# Altium PCB mini_backplane.PcbDoc (part 2 of 3)
Units mil, origin at the board's own origin, x right, y up, seen from the top; angles counter-clockwise.
Board outline 11387.22 x 6068.2 mil, 4 copper layers (Top Layer, POWER, GND, Bottom Layer); 147 components, 166 nets, 1018 pads, 501 vias.
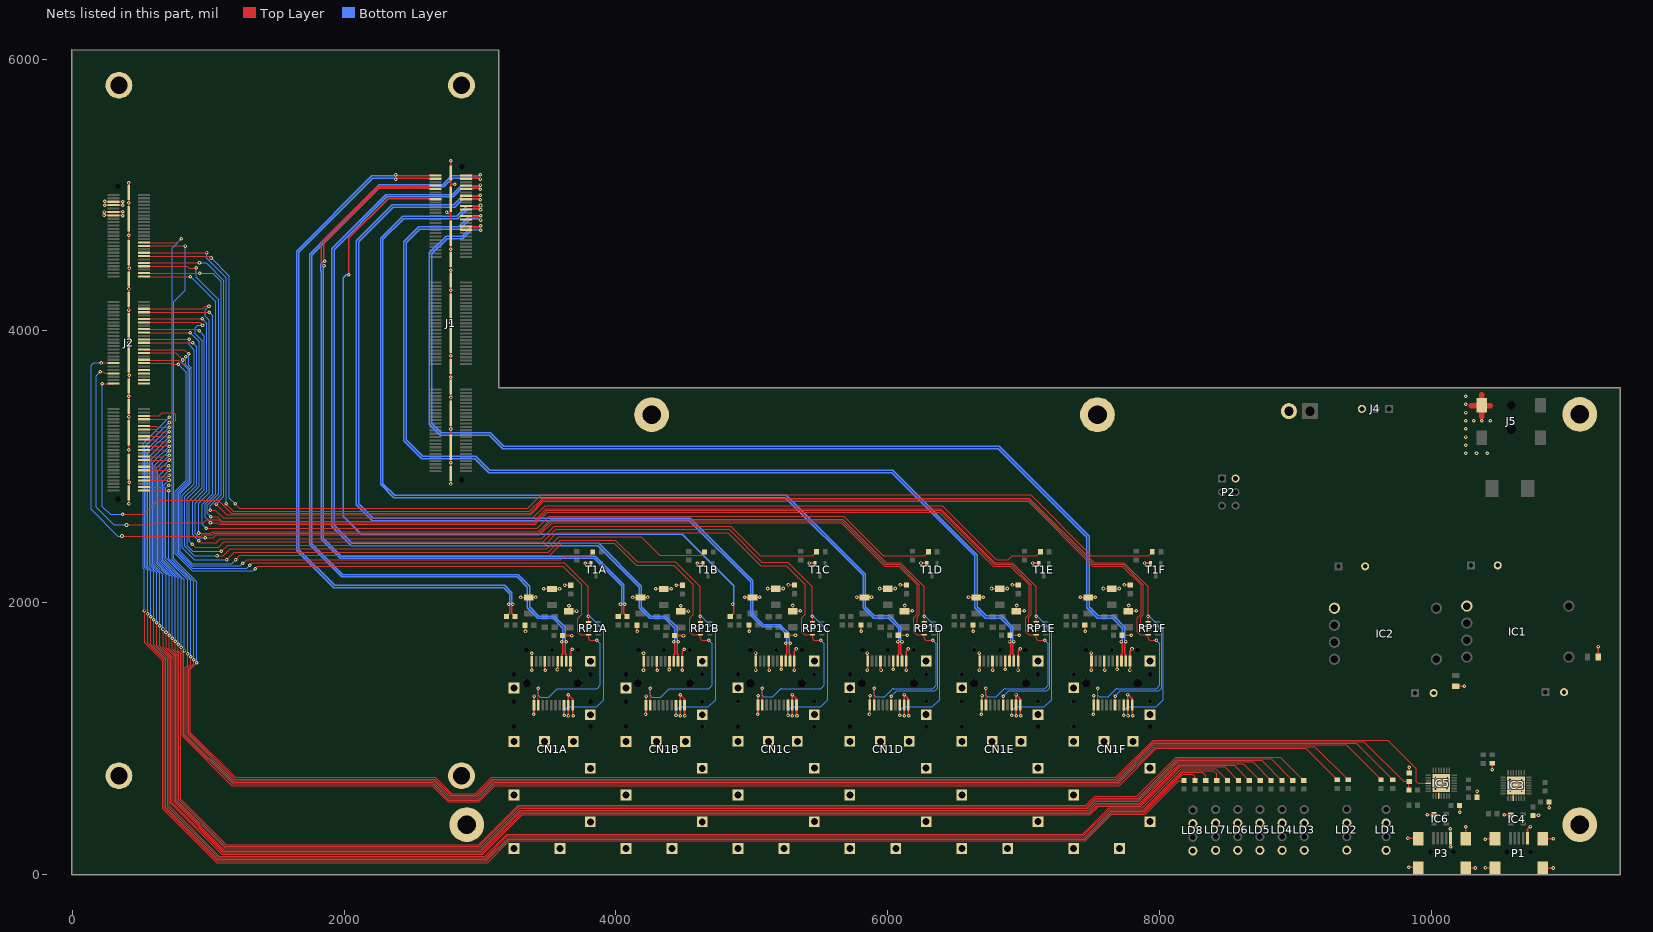
[diagram p4: the nets of this part, all layers, seen from the top]

## Via types
v1: diameter 26, hole 12, Top Layer to Bottom Layer, tented both sides, 501 vias

## Nets (pads, with @x,y where several pads share a name; then routed paths per layer and width w, separated by ;. In a path a pad name is that pad's centre, name@x,y a point inside that pad or via, vN(x,y) a via of type N, cw(c..) or ccw(c..) an arc to the next point about the centre after c; other vN are vias at no path point) (continued)
DETECTD: CN1D.6 J2.41 RP1D.6 | length 9036.5
  Top Layer w6: v1(214,3765) 302.83,3765 J2.41@304.53,3763.31 ; v1(367,2492) 949,2492 957,2500 1034,2500 1047,2513 1231,2513 ; 1225,2513 1231,2513 ; CN1D.6@6025.33,1249.02 6025.33,1312.33 v1(6026,1313) ; RP1D.6@6269,1828.99 6266.99,1831 v1(6215,1831) 6215,1893 6233,1911 6233,2133.94 6083.94,2283 5981.94,2283 5661.94,2603 3525.06,2603 3435.06,2513 1231,2513
  Bottom Layer w6: v1(214,3765) 159,3765 141,3747 141,3683 141,2688.18 337.18,2492 v1(367,2492) ; v1(6026,1313) 6065,1352 6347,1352 6369,1374 6369,1793 6331,1831 v1(6215,1831)
DETECTE: CN1E.6 J2.37 RP1E.6 | length 9719.1
  Top Layer w6: v1(208,3700) 228.35,3700 240,3688.35 J2.37@304.53,3688.35 ; v1(400,2573) 592,2573 608,2589 968,2589 991,2612 1073.12,2612 1096.12,2589 3403.06,2589 3494.06,2680 6384.09,2680 6781.09,2283 6906.94,2283 7056,2133.94 7056,1911 7038,1893 v1(7038,1831) 7089.99,1831 RP1E.6@7092,1828.99 ; CN1E.6@6848.33,1249.02 v1@6848.33,1312.33
  Bottom Layer w6: v1(208,3700) 177,3669 177,2703.09 187,2693.09 307.09,2573 v1(400,2573) ; v1(6849,1313) 6888,1352 7170,1352 7192,1374 7192,1793 7154,1831 v1(7038,1831)
DETECTF: CN1F.6 J2.33 RP1F.6 | length 10432.8
  Top Layer w6: v1(223,3612) 224.39,3613.39 J2.33@304.53,3613.39 ; v1(373,2651) 526,2651 631,2756 1075.89,2756 1170.89,2661 3368.06,2661 3465.06,2758 7036.94,2758 7511.94,2283 7729.94,2283 7879,2133.94 7879,1911 7861,1893 v1(7861,1831) 7912.99,1831 RP1F.6@7915,1828.99 ; CN1F.6@7671.33,1249.02 v1@7671.33,1312.33
  Bottom Layer w6: v1(223,3612) 223,2708 280,2651 v1(373,2651) ; v1(7672,1313) 7711,1352 7993,1352 8015,1374 8015,1793 7977,1831 v1(7861,1831)
FPGA_GPIO0: J2.2 R1.1 | length 11382.9
  Top Layer w6: J2.2@530.12,2825.98 v1(712,2826) ; v1(871.75,1604.25) 871.75,1547.69 846,1521.94 846,1036 1190,692 2663,692 2782,573 2976,573 3095,692 7686,692 7961,967 9445.5,967 R1.1@9714,698.5
  Bottom Layer w6: v1(712,2826) 712,2326.06 871.75,2166.31 v1(871.75,1604.25)
FPGA_GPIO1: J2.4 R2.1 | length 11358.2
  Top Layer w6: J2.4@530.12,2851.18 696.18,2851.18 v1(710,2865) ; v1(849.12,1626.88) 849.12,1542.03 834,1526.91 834,1031.03 1185.03,680 2658.03,680 2777.03,561 2980.97,561 3099.97,680 7690.97,680 7965.97,955 9371.5,955 R2.1@9628,698.5
  Bottom Layer w6: v1(710,2865) 690,2845 690,2331 849.12,2171.88 v1(849.12,1626.88)
FPGA_GPIO2: J2.6 R3.1 | length 11166
  Top Layer w6: J2.6@530.12,2900.94 709.94,2900.94 v1(713,2904) ; v1(826.49,1649.51) 822,1645.02 822,1026.06 1180.06,668 2653.06,668 2772.06,549 2985.94,549 3104.94,668 7695.94,668 7970.94,943 9141.5,943 R3.1@9386,698.5
  Bottom Layer w6: v1(713,2904) 678,2869 678,2320 826.49,2171.51 v1(826.49,1649.51)
FPGA_GPIO3: J2.8 R4.1 | length 11143.7
  Top Layer w6: J2.8@530.12,2926.14 699.14,2926.14 v1(713,2940) ; v1(803.86,1672.14) 804.49,1671.51 804.49,1640.4 810,1634.89 810,1021.09 1175.09,656 2648.09,656 2767.09,537 2990.91,537 3109.91,656 7700.91,656 7975.91,931 9074.5,931 R4.1@9307,698.5
  Bottom Layer w6: v1(713,2940) 666,2893 666,2315.03 803.86,2177.17 v1(803.86,1672.14)
FPGA_GPIO4: J2.10 R5.1 | length 11424.6
  Top Layer w6: J2.10@530.12,2975.91 712.91,2975.91 v1(713,2976) ; v1(781.24,1694.76) 781.86,1694.14 781.86,1646.05 798,1629.92 798,556 1132,222 2991,222 3280.91,511.91 7457.09,511.91 7521.18,576 7832.18,576 8122.18,866 8886.5,866 R5.1@9059,693.5
  Bottom Layer w6: v1(713,2976) 654,2917 654,2310.06 781.24,2182.82 v1(781.24,1694.76)
FPGA_GPIO5: J2.12 R6.1 | length 11397
  Top Layer w6: J2.12@530.12,3001.1 651.1,3001.1 657.1,3001.1 664,3008 v1(712,3008) ; v1@759.24,1716.76 759.24,1651.71 786,1624.95 786,551.03 1127.03,210 2995.97,210 3285.88,499.91 7462.06,499.91 7526.15,564 7837.15,564 8127.15,854 8818.5,854 R6.1@8979,693.5
  Bottom Layer w6: v1(712,3008) 642,2938 642,2305.09 758.61,2188.48 v1(758.61,1717.39)
FPGA_GPIO6: J2.14 R7.1 | length 11380.8
  Top Layer w6: J2.14@530.12,3050.87 713.87,3050.87 v1(714,3051) ; v1(735.98,1740.02) 736.61,1739.39 736.61,1657.37 774,1619.98 774,546.06 1122.06,198 3000.94,198 3290.85,487.91 7467.03,487.91 7531.12,552 7842.12,552 8132.12,842 8750.5,842 R7.1@8899,693.5
  Bottom Layer w6: v1(714,3051) 630,2967 630,2300.12 735.98,2194.14 v1(735.98,1740.02)
FPGA_GPIO7: J2.16 R8.1 | length 11359.6
  Top Layer w6: J2.16@530.12,3076.06 671.06,3076.06 682,3087 713,3087 v1(714,3086) ; v1@713.98,1762.02 713.98,1663.02 762,1615.01 762,541.09 1117.09,186 3005.91,186 3295.82,475.91 7472,475.91 7536.09,540 7847.09,540 8040.54,733.46 8137.09,830 8682.5,830 R8.1@8819,693.5
  Bottom Layer w6: v1(713.35,1762.65) 713.35,2199.79 618,2295.15 618,2990 v1(714,3086)
FPGA_GPIO8: J2.18 R9.1 | length 11330.6
  Top Layer w6: J2.18@530.12,3125.83 664.17,3125.83 673,3117 713,3117 v1(714,3118) ; v1@691.35,1784.65 691.35,1668.68 750,1610.03 750,536.12 1112.12,174 3010.88,174 3300.79,463.91 7476.97,463.91 7541.06,528 7852.06,528 8049.03,724.97 8142.06,818 8614.5,818 R9.1@8739,693.5
  Bottom Layer w6: v1(690.73,1785.27) 690.73,2205.45 606,2290.18 606,3010 v1(714,3118)
FPGA_GPIO9: J2.20 R10.1 | length 11303.9
  Top Layer w6: J2.20@530.12,3151.02 679.02,3151.02 683,3155 712,3155 v1(714,3153) ; v1@668.73,1807.27 668.73,1674.34 738,1605.06 738,531.15 1107.15,162 3015.85,162 3305.76,451.91 7481.94,451.91 7546.03,516 7857.03,516 8147.03,806 8546.5,806 R10.1@8659,693.5
  Bottom Layer w6: v1(668.1,1807.9) 668.1,2211.11 594,2285.21 594,3033 v1(714,3153)
FPGA_GPIO10: J2.22 R11.1 | length 11282.5
  Top Layer w6: J2.22@530.12,3200.79 607.21,3200.79 621,3187 713,3187 v1(714,3188) ; v1@646.1,1829.9 646.1,1680 726,1600.09 726,526.18 1102.18,150 3020.82,150 3310.73,439.91 7486.91,439.91 7551,504 7862,504 8152,794 8478.5,794 R11.1@8579,693.5
  Bottom Layer w6: v1(645.47,1830.53) 645.47,2216.76 582,2280.24 582,3056 v1(714,3188)
FPGA_GPIO11: J2.24 R12.1 | length 11258.7
  Top Layer w6: J2.24@530.12,3225.98 642,3225.98 645.98,3222 v1(714,3222) ; v1(622.84,1853.16) 623.47,1852.53 623.47,1685.65 714,1595.12 714,506.88 1082.88,138 3036.75,138 3196.75,298 7434.12,298 7628.12,492 7870,492 8157,779 8413.5,779 R12.1@8499,693.5
  Bottom Layer w6: v1(622.84,1853.16) 622.84,2222.42 570,2275.27 570,3078 v1(714,3222)
FPGA_GPIO12: J2.26 R13.1 | length 11283.8
  Top Layer w6: J2.26@530.12,3275.75 606.25,3275.75 623,3259 v1(714,3259) ; v1(600.22,1875.78) 600.84,1875.16 600.84,1691.31 702,1590.15 702,501.91 1077.91,126 3041.72,126 3201.72,286 7439.09,286 7633.09,480 7877.06,480 8164.06,767 8395,767 8419,743 R13.1@8419,693.5
  Bottom Layer w6: 558,3048 558,3034 ; v1(600.22,1875.78) 600.22,2228.08 558,2270.3 558,3034 ; v1(714,3259) 558,3103 558,3034
FPGA_GPIO13: J2.28 R14.1 | length 11264.5
  Top Layer w6: J2.28@534.38,3301 618,3301 627,3292 v1(714,3292) ; v1(577.59,1898.41) 578.22,1897.78 578.22,1696.97 690,1585.18 690,496.94 1072.94,114 3046.69,114 3206.69,274 7444.06,274 7638.06,468 7882.03,468 8169.03,755 8312,755 8339,728 R14.1@8339,693.5
  Bottom Layer w6: 546,3048 546,3010 ; v1(577.59,1898.41) 577.59,2233.74 546,2265.32 546,3010 ; v1(714,3292) 546,3124 546,3010
FPGA_GPIO14: J2.30 R15.1 | length 11141.4
  Top Layer w6: J2.30@530.12,3350.71 699.71,3350.71 v1(714,3365) ; v1(532.33,1943.67) 532.96,1943.04 532.96,1708.28 666,1575.24 666,487 1063,90 3056.63,90 3216.63,250 7454,250 7648,444 7892,444 8141.5,693.5 R15.1@8179,693.5
  Bottom Layer w6: 522,3048 522,3041 ; v1(532.33,1943.67) 532.33,2245.05 522,2255.38 522,3041 ; v1(714,3365) 522,3173 522,3041
FPGA_GPIO15: J2.32 R16.1 | length 11407
  Top Layer w6: J2.32@530.12,3375.91 641.91,3375.91 663,3397 749,3397 761,3385 761,3344 744,3327 v1(714,3327) ; v1(554.96,1921.04) 555.59,1920.41 555.59,1702.62 678,1580.21 678,491.97 1067.97,102 3051.66,102 3211.66,262 7449.03,262 7643.03,456 7887,456 8170,739 8244,739 8259,724 R16.1@8259,693.5
  Bottom Layer w6: 534,3048 534,2993 ; v1(554.96,1921.04) 554.96,2239.39 534,2260.35 534,2993 ; v1(714,3327) 534,3147 534,2993
FPGA_GPIO16: J2.34
FPGA_GPIO17: J2.36
FPGA_GPIO18: J2.38
FPGA_GPIO19: J2.40
FPGA_GPIO20: CN1A.2 J2.42 RP1A.8 | length 6382.1
  Top Layer w6: J2.42@530.12,3763.31 721,3763.31 729.31,3755 v1(781,3755) ; v1(1348,2252) 1366,2270 1410,2270 ; 1405,2270 1410,2270 ; v1(3429,1372) 3429.35,1371.65 CN1A.2@3429.35,1248.02 ; 3747,1934 3747,1931 ; v1(3860,1725) 3809,1725 3799,1735 RP1A.8@3799,1765 3742,1765 3720,1787 3720,1888 3747,1915 3747,1931 ; 1410,2270 3608.97,2270 3747,2131.97 3747,1931
  Bottom Layer w6: v1(781,3755) 841,3695 841,2901.91 760,2820.91 760,2360.09 883.09,2237 1333,2237 v1(1348,2252) ; v1@782,3758 v1@783,3757 ; v1(3429,1372) 3429,1320 3442,1307 3506,1307 3568.5,1369.5 3569.06,1368.94 3860.94,1368.94 3886,1394 3886,1699 v1(3860,1725)
FPGA_GPIO21: J2.44 R28A.1 | length 4978.2
  Top Layer w6: J2.44@530.12,3788.5 532.62,3786 782.14,3786 810.14,3758 828,3758 835.25,3765.25 v1(835.25,3809.25) ; v1(1256,2291) 1259,2291 1286,2318 3594,2318 3623,2347 3802.5,2347 R28A.1@3829.5,2374
  Bottom Layer w6: v1(835.25,3809.25) 835.25,3752.69 865,3722.94 865,2891.97 784,2810.97 784,2370.03 882.03,2272 1237,2272 v1(1256,2291)
FPGA_GPIO22: CN1A.8 J2.46 RP1A.5 | length 6302.5
  Top Layer w6: J2.46@530.12,3838.27 760.99,3838.27 v1(812.63,3786.63) ; v1(1307,2277) 1324,2294 1413,2294 ; 1405,2294 1413,2294 ; CN1A.8@3618.32,1248.02 3618.32,1173.68 v1(3619,1173) ; RP1A.5@3799,1859.49 3799,1901 v1(3798,1902) 3798,2117 3621,2294 1413,2294
  Bottom Layer w6: v1(812.63,3786.63) 812.63,3758.34 853,3717.97 853,2896.94 772,2815.94 772,2365.06 882.06,2255 1285,2255 v1(1307,2277) ; v1(3619,1173) 3619,1206 3648,1235 3858,1235 3911,1288 3911,1796.97 3805.97,1902 v1(3798,1902)
FPGA_GPIO23: CN1B.2 J2.48 RP1B.8 | length 7397
  Top Layer w6: J2.48@530.12,3863.46 826.3,3863.46 v1(857.88,3831.88) ; v1(1202,2317) 1234,2349 3511.88,2349 3600.88,2438 3986.97,2438 4147.97,2277 4425.81,2277 4570,2132.81 4570,1931 ; v1(4252,1372) 4252.35,1371.65 CN1B.2@4252.35,1248.02 ; 4570,1934 4570,1931 ; v1(4683,1725) 4632,1725 4622,1735 RP1B.8@4622,1765 4565,1765 4543,1787 4543,1888 4570,1915 4570,1931
  Bottom Layer w6: v1(857.88,3831.88) 857.88,3747.03 877,3727.91 877,2887 796,2806 796,2375 882,2289 1174,2289 v1(1202,2317) ; v1(4252,1372) 4252,1320 4265,1307 4329,1307 4391.5,1369.5 4392.06,1368.94 4683.94,1368.94 4709,1394 4709,1699 v1(4683,1725)
FPGA_GPIO24: J2.50 R28B.1 | length 5880
  Top Layer w6: J2.50@530.12,3913.23 887.23,3913.23 v1(888,3914) ; v1(1066,2346) 1112.08,2346 1163.08,2397 3492,2397 3581,2486 4187,2486 4321.22,2351.78 4630.28,2351.78 R28B.1@4652.5,2374
  Bottom Layer w6: v1(888,3914) 917,3885 917,2867 829,2779 829,2416 899,2346 v1(1066,2346)
FPGA_GPIO25: CN1B.8 J2.52 RP1B.5 | length 7331.2
  Top Layer w6: J2.52@530.12,3938.43 530.54,3938 v1(861,3938) ; v1(1136,2317) 1192,2373 1221,2373 ; 1213,2373 1221,2373 ; CN1B.8@4441.32,1248.02 4441.32,1173.68 v1(4442,1173) ; RP1B.5@4622,1859.49 4622,1901 v1(4621,1902) 4621,2117.84 4436.37,2302.48 4156.43,2302.48 3996.91,2462 3590.94,2462 3501.94,2373 1221,2373
  Bottom Layer w6: v1(861,3938) 861,3897 899,3859 899,2878 811,2790 811,2406 900,2317 v1(1136,2317) ; v1(4442,1173) 4442,1206 4471,1235 4681,1235 4734,1288 4734,1796.97 4628.97,1902 v1(4621,1902)
FPGA_GPIO26: CN1C.2 J2.54 RP1C.8 | length 8315.2
  Top Layer w6: J2.54@530.12,3988.19 869.81,3988.19 v1(870,3988) ; v1(1098,2380) 1143,2425 1222,2425 ; 1217,2425 1222,2425 ; v1(5076,1373) 5076.35,1372.65 CN1C.2@5076.35,1249.02 ; 5394,1935 5394,1932 ; v1(5507,1726) 5456,1726 5446,1736 RP1C.8@5446,1766 5389,1766 5367,1788 5367,1889 5394,1916 5394,1932 ; 1222,2425 3475.03,2425 3566.03,2516 4824.12,2516 5065.12,2275 5180,2275 5251.97,2275 5394,2132.97 5394,1932
  Bottom Layer w6: v1(870,3988) 936,3922 936,2859 846,2769 846,2422 888,2380 v1(1098,2380) ; v1(5076,1373) 5076,1321 5089,1308 5153,1308 5215.5,1370.5 5216.06,1369.94 5507.94,1369.94 5533,1395 5533,1700 v1(5507,1726)
FPGA_GPIO27: J2.56 R28C.1 | length 6736.6
  Top Layer w6: J2.56@530.12,4013.39 922.61,4013.39 v1(935,4001) ; v1(932,2457) 948,2441 1059,2441 1091,2473 1226,2473 ; 1217,2473 1226,2473 ; R28C.1@5476.5,2375 5449.5,2348 5060,2348 4844,2564 3546.15,2564 3455.15,2473 1226,2473
  Bottom Layer w6: v1(932,2457) 886,2503 886,2744 973,2831 973,3963 v1(935,4001)
FPGA_GPIO28: CN1C.8 J2.58 RP1C.5 | length 8324.7
  Top Layer w6: J2.58@530.12,4063.15 937.85,4063.15 v1(959,4042) ; v1(885,2431) 906,2410 1078,2410 1117,2449 1225,2449 ; 1217,2449 1225,2449 ; CN1C.8@5265.32,1249.02 5265.32,1174.68 v1(5266,1174) ; RP1C.5@5446,1860.49 5446,1902 v1(5445,1903) 5445,2118 5262.52,2300.48 5073.58,2300.48 4834.06,2540 3556.09,2540 3465.09,2449 1225,2449
  Bottom Layer w6: v1(885,2431) 863,2453 863,2752 957,2846 957,3929 905,3981 905,4007 905,4024 923,4042 v1(959,4042) ; v1(5266,1174) 5266,1207 5295,1236 5505,1236 5558,1289 5558,1797.97 5452.97,1903 v1(5445,1903)
FPGA_GPIO29: CN1D.2 J2.60 RP1D.8 | length 9173.3
  Top Layer w6: J2.60@530.12,4088.35 955.35,4088.35 v1(956,4089) ; v1(978,2478) 1038,2478 1061,2501 3440.03,2501 3530.03,2591 5656.97,2591 5976.97,2271 6078.97,2271 6217,2132.97 6217,1916 6190,1889 6190,1788 6212,1766 RP1D.8@6269,1766 6269,1736 6279,1726 v1(6330,1726) ; v1(5899,1373) 5899.35,1372.65 CN1D.2@5899.35,1249.02
  Bottom Layer w6: v1(956,4089) 991,4054 991,2820 905,2734 905,2509.89 935.89,2479 955,2479 977,2479 v1(978,2478) ; v1(5899,1373) 5899,1321 5912,1308 5976,1308 6038.5,1370.5 6039.06,1369.94 6330.94,1369.94 6356,1395 6356,1700 v1(6330,1726)
FPGA_GPIO30: J2.62 R28D.1 | length 7610.5
  Top Layer w6: J2.62@530.12,4138.11 v1@1017.89,4138.11 ; v1@988,2549 3420.15,2549 3510.15,2639 5676.85,2639 5967.85,2348 6272.5,2348 R28D.1@6299.5,2375
  Bottom Layer w6: v1(987,2550) 957,2580 957,2727 1033,2803 1033,4113 v1(1008,4138)
FPGA_GPIO31: CN1D.8 J2.64 RP1D.5 | length 9174.5
  Top Layer w6: J2.64@530.12,4163.31 960.31,4163.31 978,4181 v1(1007,4181) ; v1(932,2514) 934,2512 1020,2512 1033,2525 1251,2525 ; 1225,2525 1251,2525 ; CN1D.8@6088.32,1249.02 6088.32,1174.68 v1(6089,1174) ; RP1D.5@6269,1860.49 6269,1902 v1(6268,1903) 6268,2118 6091,2295 5986.91,2295 5666.91,2615 3520.09,2615 3430.09,2525 1251,2525
  Bottom Layer w6: v1(932,2514) 932,2732 1009,2809 1009,4079 981,4107 981,4155 v1(1007,4181) ; v1(6089,1174) 6089,1207 6118,1236 6328,1236 6381,1289 6381,1797.97 6275.97,1903 v1(6268,1903)
FPGA_GPIO32: CN1E.2 J2.66 RP1E.8 | length 10115.9
  Top Layer w6: J2.66@530.12,4400.79 868.21,4400.79 v1(869,4400) ; v1(1018,2590) 1069,2590 1082,2577 3408.03,2577 3499.03,2668 6379.12,2668 6776.12,2271 6901.97,2271 7040,2132.97 7040,1916 7013,1889 7013,1788 7035,1766 RP1E.8@7092,1766 7092,1736 7102,1726 v1(7153,1726) ; v1(6722,1373) 6722.35,1372.65 CN1E.2@6722.35,1249.02
  Bottom Layer w6: v1@871,4400 913,4358 1055,4216 1055,2801 979,2725 979,2629 v1(1018,2590) ; v1(6722,1373) 6722,1321 6735,1308 6799,1308 6861.5,1370.5 6862.06,1369.94 7153.94,1369.94 7179,1395 7179,1700 v1(7153,1726)
FPGA_GPIO33: J2.68 R28E.1 | length 8663.5
  Top Layer w6: J2.68@530.12,4425.98 938.02,4425.98 v1(939,4425) ; v1(1015.75,2681.75) 1054.28,2681.75 1111.03,2625 3388.15,2625 3479.15,2716 6399,2716 6796,2319 6887,2319 6916,2348 7095.5,2348 R28E.1@7122.5,2375
  Bottom Layer w6: v1(939,4425) 1035,4425 1097,4363 1097,2796 1015.75,2714.75 v1(1015.75,2681.75)
FPGA_GPIO34: CN1E.8 J2.70 RP1E.5 | length 10049.5
  Top Layer w6: J2.70@530.12,4475.75 847.25,4475.75 860,4463 910,4463 v1(912,4465) ; v1(1019,2634) 1068.09,2634 1101.09,2601 3398.09,2601 3489.09,2692 6389.06,2692 6786.06,2295 6914,2295 7091,2118 v1(7091,1903) ; v1@6911.32,1174.68 CN1E.8@6911.32,1249.02 ; RP1E.5@7092,1860.49 v1@7092,1902
  Bottom Layer w6: v1(912,4465) 912,4397 918.5,4390.5 1078,4231 1078,2801 993.75,2716.75 993.75,2659.25 v1(1019,2634) ; v1(6912,1174) 6912,1207 6941,1236 7151,1236 7204,1289 7204,1797.97 7098.97,1903 v1(7091,1903)
FPGA_GPIO35: CN1F.2 J2.72 RP1F.8 | length 11005
  Top Layer w6: J2.72@530.12,4500.94 v1(937,4501) v1(937,4501) ; v1(1061,2727) 1139,2649 3373.03,2649 3470.03,2746 7031.97,2746 7506.97,2271 7724.97,2271 7863,2132.97 7863,1932 ; v1(7545,1373) 7545.35,1372.65 CN1F.2@7545.35,1249.02 ; 7863,1935 7863,1932 ; v1(7976,1726) 7925,1726 7915,1736 RP1F.8@7915,1766 7858,1766 7836,1788 7836,1889 7863,1916 7863,1932
  Bottom Layer w6: v1(937,4501) 986,4501 1117,4370 1117,4241 ; v1(1061,2727) 1117,2783 1117,4241 ; 1117,4231 1117,4241 ; v1(7545,1373) 7545,1321 7558,1308 7622,1308 7684.5,1370.5 7685.06,1369.94 7976.94,1369.94 8002,1395 8002,1700 v1(7976,1726)
FPGA_GPIO36: J2.74 R28F.1 | length 9375.9
  Top Layer w6: J2.74@530.12,4550.71 1008.29,4550.71 v1(1022,4537) ; v1(1199,2728) 1199,2727 1229,2697 3353.15,2697 3450.15,2794 7051.85,2794 7497.85,2348 7918.5,2348 R28F.1@7945.5,2375
  Bottom Layer w6: v1(1022,4537) 1157,4402 1157,2770 v1(1199,2728)
FPGA_GPIO37: CN1F.8 J2.76 RP1F.5 | length 10846.5
  Top Layer w6: J2.76@530.12,4575.91 983.91,4575.91 v1@989,4581 ; v1(1135,2728) 1135,2724 1186,2673 3363.09,2673 3460.09,2770 7041.91,2770 7516.91,2295 7737,2295 7914,2118 v1(7914,1903) 7915,1902 RP1F.5@7915,1860.49 ; CN1F.8@7734.32,1249.02 7734.32,1174.68 v1(7735,1174)
  Bottom Layer w6: v1@989,4581 989,4536 1135,4390 v1(1135,2728) ; v1(7735,1174) 7735,1207 7764,1236 7974,1236 8027,1289 8027,1797.97 7921.97,1903 v1(7914,1903)
  other v1: 989,4577
FPGA_RXD: IC5.25 J2.78 | length 13647.5
  Top Layer w6: J2.78@530.12,4625.67 831.33,4625.67 v1(832,4625) ; v1(917,1559) 870,1512 870,1045.94 1199.94,716 2672.94,716 2791.94,597 2966.06,597 3085.06,716 7676.06,716 7951.06,991 9677,991 9888,780 9888,686 9900,674 IC5.25@9976.51,674
  Bottom Layer w6: v1(832,4625) 832,4300 748,4216 748,2324 917,2155 v1(917,1559)
FPGA_TXD: J2.80 R26.1 R27.1 | length 13545.7
  Top Layer w6: J2.80@530.12,4650.87 776.87,4650.87 v1(804,4678) ; v1(894.37,1581.63) 894.37,1553.34 858,1516.97 858,1040.97 1194.97,704 2667.97,704 2786.97,585 2971.03,585 3090.03,704 7681.03,704 7956.03,979 9502,979 9794.5,686.5 R27.1@9836,686.5 9833.5,684.01 R26.1@9833.5,624
  Bottom Layer w6: v1(804,4678) 736,4610 736,2319.03 894.37,2160.66 v1(894.37,1581.63)
GND: C1A.2 C1B.2 C1C.2 C1D.2 C1E.2 C1F.2 C2A.2 C2B.2 C2C.2 C2D.2 C2E.2 C2F.2 C3A.1 C3B.1 C3C.1 C3D.1 C3E.1 C3F.1 C4A.1 C4B.1 C4C.1 C4D.1 C4E.1 C4F.1 C5A.1 C5B.1 C5C.1 C5D.1 C5E.1 C5F.1 C6A.1 C6B.1 C6C.1 C6D.1 C6E.1 C6F.1 C9.2 C10.2 C11.2 C12.2 C13.2 C14.2 C15.2 C16.2 CN1A.1 CN1A.9 CN1A.10 CN1A.11 CN1A.14 CN1A.17 CN1A.20 CN1A.21 CN1A.22 CN1A.23 CN1A.24 CN1A.25 CN1A.26 CN1A.27 CN1A.28 CN1A.29 CN1A.30 CN1A.31 CN1B.1 CN1B.9 CN1B.10 CN1B.11 CN1B.14 CN1B.17 CN1B.20 CN1B.21 CN1B.22 CN1B.23 CN1B.24 CN1B.25 CN1B.26 CN1B.27 CN1B.28 CN1B.29 CN1B.30 CN1B.31 CN1C.1 CN1C.9 CN1C.10 CN1C.11 CN1C.14 CN1C.17 CN1C.20 CN1C.21 CN1C.22 CN1C.23 CN1C.24 CN1C.25 CN1C.26 CN1C.27 CN1C.28 CN1C.29 CN1C.30 CN1C.31 CN1D.1 CN1D.9 CN1D.10 CN1D.11 CN1D.14 CN1D.17 CN1D.20 CN1D.21 CN1D.22 CN1D.23 CN1D.24 CN1D.25 CN1D.26 CN1D.27 CN1D.28 CN1D.29 CN1D.30 CN1D.31 CN1E.1 CN1E.9 CN1E.10 CN1E.11 CN1E.14 CN1E.17 CN1E.20 CN1E.21 CN1E.22 CN1E.23 CN1E.24 CN1E.25 CN1E.26 CN1E.27 CN1E.28 CN1E.29 CN1E.30 CN1E.31 CN1F.1 CN1F.9 CN1F.10 CN1F.11 CN1F.14 CN1F.17 CN1F.20 CN1F.21 CN1F.22 CN1F.23 CN1F.24 CN1F.25 CN1F.26 CN1F.27 CN1F.28 CN1F.29 CN1F.30 CN1F.31 IC1.1 IC2.1 IC3.3 IC3.29 IC4.1 IC5.3 IC5.29 IC6.1 J1.97 J1.98 J1.99 J1.100 J1.101 J1.102 J1.103 J1.104 J1.105 J1.106 J1.107 J1.108 J2.89 J2.91 J2.93 J2.95 J2.97 J2.98 J2.99 J2.100 J2.101 J2.102 J2.103 J2.104 J2.105 J2.106 J2.107 J2.108 J3.2 J4.3 J5.1 LD1.1 LD1.3 LD2.1 LD2.3 LD3.1 LD3.3 LD4.1 LD4.3 LD5.1 LD5.3 LD6.1 LD6.3 LD7.1 LD7.3 LD8.1 LD8.3 P1.5 P1.6 P2.2 P3.5 P3.6 pad. pad.MOUNT R18.1 R19.1 R23.2 R27.2 T1A.2 T1B.2 T1C.2 T1D.2 T1E.2 T1F.2 | length 15789.9
  Top Layer w6: v1(10334,614) 10334.5,613.5 C16.2@10334.5,571
  Top Layer w12: v1(235,4850) 235.55,4850.55 J2.89@304.53,4850.55 370.45,4850.55 v1(373,4848) ; v1(236,4875) 236.75,4875.75 J2.91@304.53,4875.75 372.75,4875.75 v1(373,4876) ; v1(239,4924) 240.51,4925.51 J2.93@304.53,4925.51 371.49,4925.51 v1(373,4924) ; v1(241,4953) 243.29,4950.71 J2.95@304.53,4950.71 371.71,4950.71 v1(372,4951) ; v1(417,5089) 417.32,5088.68 J2.108@417.32,5018.31 417.32,4943.32 v1(417,4943) 417,4826.11 J2.107@417.32,4825.79 417.32,4704.32 v1(417,4704) 417,4576.11 J2.106@417.32,4575.79 417.32,4461.68 v1(419,4460) 419,4384.94 J2.105@417.32,4383.27 417.32,4309.68 v1(418,4309) 418,4231.58 J2.104@417.32,4230.91 417.32,4154.32 v1(417,4154) 417,4038.71 J2.103@417.32,4038.39 417.32,3915.32 v1(417,3915) 417,3788.71 J2.102@417.32,3788.39 417.32,3675.68 v1(419,3674) 419,3597.54 J2.101@417.32,3595.87 417.32,3519.32 v1(417,3519) 417,3443.83 J2.100@417.32,3443.5 417.32,3368.68 v1(418,3368) 418,3251.66 J2.99@417.32,3250.98 417.32,3126.32 v1(417,3126) 417,3001.31 J2.98@417.32,3000.98 417.32,2888.68 v1(419,2887) 419,2810.14 J2.97@417.32,2808.46 417.32,2730.68 v1(418,2730) ; v1(2754,4874) 2766,4862 2785.43,4862 ; v1(2785,2875) 2785.43,2875.43 J1.108@2785.43,2952.17 v1(2785.43,3030) J1.107@2785.43,3144.68 2785.43,3278.57 v1(2785,3279) 2785,3394.25 J1.106@2785.43,3394.68 v1(2785.43,3511) v1(2785.43,3661) v1(2785.43,3817) v1(2785.43,4061) v1(2785.43,4300) v1(2785.43,4447) v1(2785.43,4600) 2785.43,4862 ; v1(2786,5253) 2785.43,5252.43 2785.43,5079 ; v1(2815,5080) 2786.43,5080 2785.43,5079 ; v1(3300,2040) 3300.94,2039.06 C3A.1@3358,2039.06 3409.06,2039.06 v1(3410,2040) ; C4A.1@3332.5,1836 3332.5,1792.5 v1(3335,1790) ; v1(3380,1505) 3382.1,1507.1 CN1A.20@3382.1,1570.85 3382.1,1627.9 v1(3380,1630) ; v1(3395,1180) 3397.85,1182.85 CN1A.1@3397.85,1248.02 3397.85,1312.85 v1(3400,1315) ; v1(3470,2105) 3471.94,2103.06 C5A.1@3530,2103.06 3583.06,2103.06 v1(3585,2105) ; CN1A.17@3476.59,1570.85 3476.59,1508.41 v1(3480,1505) ; v1(3570,1510) 3571.08,1511.08 CN1A.14@3571.08,1570.85 ; C2A.2@3606.5,1760 3628,1760 ; v1(3622,2131) 3665.5,2131 C6A.1@3667,2129.5 ; 3645,1760 3628,1760 ; v1(3651,1170) 3650,1170 3649.82,1170.18 CN1A.9@3649.82,1248.02 3649.82,1324.82 v1(3650,1325) 3681.32,1293.68 CN1A.10@3681.32,1248.02 3681.32,1173.68 v1(3685,1170) ; v1(3655,1980) 3653,1978 C1A.2@3653,1938.06 3708.06,1938.06 v1(3710,1940) ; v1(3665,1505) 3665.57,1505.57 CN1A.11@3665.57,1570.85 3665.57,1645.57 v1(3680,1660) ; v1@3675,1761 v1(3674,1760) 3628,1760 ; v1(3774,2292) 3812.87,2292 T1A.2@3816.6,2288.28 ; v1(4123,2040) 4123.94,2039.06 C3B.1@4181,2039.06 4232.06,2039.06 v1(4233,2040) ; C4B.1@4155.5,1836 4155.5,1792.5 v1(4158,1790) ; v1(4203,1505) 4205.1,1507.1 CN1B.20@4205.1,1570.85 4205.1,1627.9 v1(4203,1630) ; v1(4218,1180) 4220.85,1182.85 CN1B.1@4220.85,1248.02 4220.85,1312.85 v1(4223,1315) ; v1(4293,2105) 4294.94,2103.06 C5B.1@4353,2103.06 4406.06,2103.06 v1(4408,2105) ; CN1B.17@4299.59,1570.85 4299.59,1508.41 v1(4303,1505) ; v1(4393,1510) 4394.08,1511.08 CN1B.14@4394.08,1570.85 ; C2B.2@4429.5,1760 4451,1760 ; v1(4445,2131) 4488.5,2131 C6B.1@4490,2129.5 ; 4468,1760 4451,1760 ; v1(4474,1170) 4473,1170 4472.82,1170.18 CN1B.9@4472.82,1248.02 4472.82,1324.82 v1(4473,1325) 4504.32,1293.68 CN1B.10@4504.32,1248.02 4504.32,1173.68 v1(4508,1170) ; v1(4478,1980) 4476,1978 C1B.2@4476,1938.06 4531.06,1938.06 v1(4533,1940) ; v1(4488,1505) 4488.57,1505.57 CN1B.11@4488.57,1570.85 4488.57,1645.57 v1(4503,1660) ; v1@4498,1761 v1(4497,1760) 4451,1760 ; v1(4597,2292) 4635.87,2292 T1B.2@4639.6,2288.28 ; v1(4947,2041) 4947.94,2040.06 C3C.1@5005,2040.06 5056.06,2040.06 v1(5057,2041) ; C4C.1@4979.5,1837 4979.5,1793.5 v1(4982,1791) ; v1(5027,1506) 5029.1,1508.1 CN1C.20@5029.1,1571.85 5029.1,1628.9 v1(5027,1631) ; v1(5042,1181) 5044.85,1183.85 CN1C.1@5044.85,1249.02 5044.85,1313.85 v1(5047,1316) ; v1(5117,2106) 5118.94,2104.06 C5C.1@5177,2104.06 5230.06,2104.06 v1(5232,2106) ; CN1C.17@5123.59,1571.85 5123.59,1509.41 v1(5127,1506) ; v1(5217,1511) 5218.08,1512.08 CN1C.14@5218.08,1571.85 ; C2C.2@5253.5,1761 5275,1761 ; v1(5269,2132) 5312.5,2132 C6C.1@5314,2130.5 ; 5292,1761 5275,1761 ; v1(5298,1171) 5297,1171 5296.82,1171.18 CN1C.9@5296.82,1249.02 5296.82,1325.82 v1(5297,1326) 5328.32,1294.68 CN1C.10@5328.32,1249.02 5328.32,1174.68 v1(5332,1171) ; v1(5302,1981) 5300,1979 C1C.2@5300,1939.06 5355.06,1939.06 v1(5357,1941) ; v1(5312,1506) 5312.57,1506.57 CN1C.11@5312.57,1571.85 5312.57,1646.57 v1(5327,1661) ; v1@5322,1762 v1(5321,1761) 5275,1761 ; v1(5421,2293) 5459.87,2293 T1C.2@5463.6,2289.28 ; v1(5770,2041) 5770.94,2040.06 C3D.1@5828,2040.06 5879.06,2040.06 v1(5880,2041) ; C4D.1@5802.5,1837 5802.5,1793.5 v1(5805,1791) ; v1(5850,1506) 5852.1,1508.1 CN1D.20@5852.1,1571.85 5852.1,1628.9 v1(5850,1631) ; v1(5865,1181) 5867.85,1183.85 CN1D.1@5867.85,1249.02 5867.85,1313.85 v1(5870,1316) ; v1(5940,2106) 5941.94,2104.06 C5D.1@6000,2104.06 6053.06,2104.06 v1(6055,2106) ; CN1D.17@5946.59,1571.85 5946.59,1509.41 v1(5950,1506) ; v1(6040,1511) 6041.08,1512.08 CN1D.14@6041.08,1571.85 ; C2D.2@6076.5,1761 6098,1761 ; v1(6092,2132) 6135.5,2132 C6D.1@6137,2130.5 ; 6115,1761 6098,1761 ; v1(6121,1171) 6120,1171 6119.82,1171.18 CN1D.9@6119.82,1249.02 6119.82,1325.82 v1(6120,1326) 6151.32,1294.68 CN1D.10@6151.32,1249.02 6151.32,1174.68 v1(6155,1171) ; v1(6125,1981) 6123,1979 C1D.2@6123,1939.06 6178.06,1939.06 v1(6180,1941) ; v1(6135,1506) 6135.57,1506.57 CN1D.11@6135.57,1571.85 6135.57,1646.57 v1(6150,1661) ; v1@6145,1762 v1(6144,1761) 6098,1761 ; v1(6244,2293) 6282.87,2293 T1D.2@6286.6,2289.28 ; v1(6593,2041) 6593.94,2040.06 C3E.1@6651,2040.06 6702.06,2040.06 v1(6703,2041) ; C4E.1@6625.5,1837 6625.5,1793.5 v1(6628,1791) ; v1(6673,1506) 6675.1,1508.1 CN1E.20@6675.1,1571.85 6675.1,1628.9 v1(6673,1631) ; v1(6688,1181) 6690.85,1183.85 CN1E.1@6690.85,1249.02 6690.85,1313.85 v1(6693,1316) ; v1(6763,2106) 6764.94,2104.06 C5E.1@6823,2104.06 6876.06,2104.06 v1(6878,2106) ; CN1E.17@6769.59,1571.85 6769.59,1509.41 v1(6773,1506) ; v1(6863,1511) 6864.08,1512.08 CN1E.14@6864.08,1571.85 ; C2E.2@6899.5,1761 6921,1761 ; v1(6915,2132) 6958.5,2132 C6E.1@6960,2130.5 ; 6938,1761 6921,1761 ; v1(6944,1171) 6943,1171 6942.82,1171.18 CN1E.9@6942.82,1249.02 6942.82,1325.82 v1(6943,1326) 6974.32,1294.68 CN1E.10@6974.32,1249.02 6974.32,1174.68 v1(6978,1171) ; v1(6948,1981) 6946,1979 C1E.2@6946,1939.06 7001.06,1939.06 v1(7003,1941) ; v1(6958,1506) 6958.57,1506.57 CN1E.11@6958.57,1571.85 6958.57,1646.57 v1(6973,1661) ; v1@6968,1762 v1(6967,1761) 6921,1761 ; v1(7067,2293) 7105.87,2293 T1E.2@7109.6,2289.28 ; v1(7416,2041) 7416.94,2040.06 C3F.1@7474,2040.06 7525.06,2040.06 v1(7526,2041) ; C4F.1@7448.5,1837 7448.5,1793.5 v1(7451,1791) ; v1(7496,1506) 7498.1,1508.1 CN1F.20@7498.1,1571.85 7498.1,1628.9 v1(7496,1631) ; v1(7511,1181) 7513.85,1183.85 CN1F.1@7513.85,1249.02 7513.85,1313.85 v1(7516,1316) ; v1(7586,2106) 7587.94,2104.06 C5F.1@7646,2104.06 7699.06,2104.06 v1(7701,2106) ; CN1F.17@7592.59,1571.85 7592.59,1509.41 v1(7596,1506) ; v1(7686,1511) 7687.08,1512.08 CN1F.14@7687.08,1571.85 ; C2F.2@7722.5,1761 7744,1761 ; v1(7738,2132) 7781.5,2132 C6F.1@7783,2130.5 ; 7761,1761 7744,1761 ; v1(7767,1171) 7766,1171 7765.82,1171.18 CN1F.9@7765.82,1249.02 7765.82,1325.82 v1(7766,1326) 7797.32,1294.68 CN1F.10@7797.32,1249.02 7797.32,1174.68 v1(7801,1171) ; v1(7771,1981) 7769,1979 C1F.2@7769,1939.06 7824.06,1939.06 v1(7826,1941) ; v1(7781,1506) 7781.57,1506.57 CN1F.11@7781.57,1571.85 7781.57,1646.57 v1(7796,1661) ; v1@7791,1762 v1(7790,1761) 7744,1761 ; v1(7890,2293) 7928.87,2293 T1F.2@7932.6,2289.28 ; v1(9826,270) 9895.87,270 P3.6@9900.8,265.06 ; v1(9831,56) 9893.33,56 P3.6@9900.8,48.53 ; R27.2@9836,749.5 v1(9836,791) ; v1(9969,441) 9969.53,441.53 IC6.1@10017.72,441.53 ; IC5.3@10051.32,579.51 10051.32,654.32 IC5.29@10071,674 ; v1(10138,339) 10138.99,338.01 P3.5@10138.99,269 10138.99,207.01 v1(10140,206) ; R19.1@10179,1386.63 10238.63,1386.63 v1(10239,1387) ; C13.2@10206.5,510 10206.5,460.5 v1(10208,459) ; v1(10251,354) 10251.2,353.8 P3.6@10251.2,265.06 ; P3.6@10251.2,48.53 10319.53,48.53 v1(10321,50) ; v1(10394,262) 10397.06,265.06 P1.6@10466.8,265.06 ; v1(10396,51) 10464.33,51 P1.6@10466.8,48.53 ; v1(10446,774) 10447,775 R23.2@10447,820.5 ; v1(10533,442) 10580.25,442 IC4.1@10582.72,439.53 ; IC3.3@10601.32,562.51 10601.32,637.32 IC3.29@10621,657 ; P1.5@10704.99,269 10704.99,333.99 v1(10726,355) ; C15.2@10746,435.5 10784.5,435.5 v1(10786,437) ; P1.6@10817.2,48.53 10893.53,48.53 v1(10895,50) ; P1.6@10817.2,265.06 10894.06,265.06 v1(10895,266) ; C14.2@10864.5,536 10864.5,492.5 v1(10865,492) ; R18.1@11225.37,1602 11225.37,1678.37 v1@11229,1682 ; 2785.43,4862 2785.43,5079
  Top Layer w40: 10290,3450 10430,3450 ; 10370,3370 10370,3530
  other v1: 10578,614 10663,615 10028,631 10113,632 10664,698 10576,701 10114,715 10026,718 11226,1679 10250,3100 10330,3100 10410,3100 10250,3160 10250,3220 10250,3280 10250,3340 10310,3340 10370,3340 10430,3340 10250,3400 10250,3460 10250,3520
MGTRX112_0_N: CN1A.12 J1.3 | length 6172.1
  Top Layer w11: J1.3@2898.23,5119.29 2948.78,5119.29 2954.49,5125 v1@2995.5,5125 ; CN1A.12@3634.07,1570.85 3634.07,1617.43 3626.82,1624.68 3626.82,1707.07 v1(3634.32,1714.57)
  Bottom Layer w11: v1@3003,5125 v1(3003,5117.5) 2995.5,5125 2799.04,5125 2734.04,5060 2268,5060 1764,4556 1764,2435 1991,2208 3280.04,2208 3365,2123.04 3365,1970 3432,1903 3544.86,1903 3626.82,1821.04 3626.82,1722.07 v1(3634.32,1714.57)
MGTRX112_0_P: CN1A.13 J1.1 | length 6191.5
  Top Layer w11: J1.1@2898.23,5144.49 2948.78,5144.49 2951.27,5142 v1@2995.5,5142 ; v1(3602.32,1714.57) 3609.82,1707.07 3609.82,1624.68 3602.57,1617.43 CN1A.13@3602.57,1570.85
  Bottom Layer w11: v1(3003,5149.5) 2995.5,5142 2792,5142 2727,5077 2260.96,5077 1747,4563.04 1747,2427.96 1983.96,2191 3273,2191 3348,2116 3348,1962.96 3424.96,1886 3537.82,1886 3609.82,1814 3609.82,1722.07 v1(3602.32,1714.57)
MGTRX112_1_N: CN1B.12 J1.7 | length 6587.8
  Top Layer w11: J1.7@2898.23,5044.33 2948.78,5044.33 2952.88,5048.43 2974,5048.43 ; 2979,5048.43 2974,5048.43 ; v1(3002,5041.5) 2995.07,5048.43 2974,5048.43 ; CN1B.12@4457.07,1570.85 4457.07,1617.43 4449.82,1624.68 4449.82,1707.07 v1(4457.32,1714.57)
  Bottom Layer w11: v1(3002,5041.5) 2994.5,5049 2867.04,5049 2804.04,4986 2603,4986 2314,4986 1927,4599 1927,2572 2061,2438 3873.04,2438 4188,2123.04 4188,1970 4255,1903 4367.86,1903 4449.82,1821.04 4449.82,1722.07 v1(4457.32,1714.57)
MGTRX112_1_P: CN1B.13 J1.5 | length 6614.4
  Top Layer w11: J1.5@2898.23,5069.53 2948.78,5069.53 2952.88,5065.43 2967,5065.43 ; 2970,5065.43 2967,5065.43 ; v1(3002,5073.5) 2994.5,5066 2967.57,5066 2967,5065.43 ; v1(4425.32,1714.57) 4432.82,1707.07 4432.82,1624.68 4425.57,1617.43 CN1B.13@4425.57,1570.85
  Bottom Layer w11: v1(3002,5073.5) 2994.5,5066 2860,5066 2797,5003 2306.96,5003 1910,4606.04 1910,2564.96 2053.96,2421 3866,2421 4171,2116 4171,1962.96 4247.96,1886 4360.82,1886 4432.82,1814 4432.82,1722.07 v1(4425.32,1714.57)
MGTRX112_2_N: CN1C.12 J1.11 | length 6998
  Top Layer w11: J1.11@2898.23,4969.37 2948.78,4969.37 2952.88,4973.47 2994.5,4973.47 v1(3002,4965.97) v1@3002,4973.47 ; CN1C.12@5281.07,1571.85 5281.07,1617.06 5273.82,1624.31 5273.82,1696.5 v1(5281.32,1704)
  Bottom Layer w11: 2107,4308 2107,4299 ; v1(3002,4965.97) 2994.97,4973 2878,4973 2815,4910 2362,4910 2107,4655 2107,4299 ; v1(5281.32,1704) 5273.82,1711.5 5273.82,1774.04 5206.86,1841 5082,1841 5007,1916 5007,2162.04 4546.04,2623 2214.04,2623 2107,2730.04 2107,4299
MGTRX112_2_P: CN1C.13 J1.9 | length 7063.6
  Top Layer w11: J1.9@2898.23,4994.57 2948.78,4994.57 2952.88,4990.47 2994.5,4990.47 v1(3002,4997.97) ; CN1C.13@5249.57,1571.85 5249.57,1617.06 5256.82,1624.31 5256.82,1696.5 v1(5249.32,1704) v1@5256.82,1704
  Bottom Layer w11: 2635,4927 2588.96,4927 ; v1(3002,4997.97) 2994.5,4990.47 2971.47,4990.47 2971,4990 2870.96,4990 2807.96,4927 2588.96,4927 ; v1(5249.32,1704) 5256.82,1711.5 5256.82,1767 5199.82,1824 5074.96,1824 4990,1908.96 4990,2155 4539,2606 2207,2606 2090,2723 2090,4662.04 2354.96,4927 2588.96,4927
MGTRX112_3_N: CN1D.12 J1.15 | length 7371.5
  Top Layer w11: J1.15@2898.23,4894.41 2948.78,4894.41 2952.88,4898.51 2996.5,4898.51 v1(3004,4891.01) v1@3004,4898.51 ; CN1D.12@6104.07,1571.85 6104.07,1618.43 6096.82,1625.68 6096.82,1708.07 v1(6104.32,1715.57)
  Bottom Layer w11: v1@3003,4898.51 2993.85,4898.51 2993.36,4899 2910,4899 2837,4826 2438,4826 2286,4674 2286,2878 2372,2792 5252.04,2792 5835,2209.04 5835,1971 5902,1904 6014.86,1904 6096.82,1822.04 6096.82,1723.07 v1(6104.32,1715.57)
MGTRX112_3_P: CN1D.13 J1.13 | length 7392.2
  Top Layer w11: J1.13@2898.23,4919.61 2948.78,4919.61 2952.88,4915.51 2996.5,4915.51 v1(3004,4923.01) ; v1(6072.32,1715.57) 6079.82,1708.07 6079.82,1625.68 6072.57,1618.43 CN1D.13@6072.57,1571.85
  Bottom Layer w11: v1@3003,4915.51 3000.89,4915.51 3000.4,4916 2902.96,4916 2829.96,4843 2430.96,4843 2269,4681.04 2269,2870.96 2364.96,2775 5245,2775 5818,2202 5818,1963.96 5894.96,1887 6007.82,1887 6079.82,1815 6079.82,1723.07 v1(6072.32,1715.57)
MGTRX113_0_N: CN1E.12 J1.19 | length 7715
  Top Layer w11: J1.19@2898.23,4819.45 2948.78,4819.45 2952.88,4823.55 2997.5,4823.55 v1(3005,4816.05) v1@3005,4823.55 ; CN1E.12@6927.07,1571.85 6927.07,1618.43 6919.82,1625.68 6919.82,1708.07 v1(6927.32,1715.57)
  Bottom Layer w11: v1(3005,4816.05) 3002.35,4816.05 2988.42,4829.98 2933.02,4829.98 2852.04,4749 2556,4749 2456,4649 2456,3200 2579,3077 2969,3077 3072,2974 6036.04,2974 6658,2352.04 6658,1971 6725,1904 6837.86,1904 6919.82,1822.04 6919.82,1723.07 v1(6927.32,1715.57)
MGTRX113_0_P: CN1E.13 J1.17 | length 7730.4
  Top Layer w11: J1.17@2898.23,4844.65 2948.78,4844.65 2952.88,4840.55 2997.5,4840.55 v1(3005,4848.05) ; v1(6895.32,1715.57) 6902.82,1708.07 6902.82,1625.68 6895.57,1618.43 CN1E.13@6895.57,1571.85
  Bottom Layer w11: v1(3005,4848.05) 3003.93,4846.98 2925.98,4846.98 2845,4766 2548.96,4766 2439,4656.04 2439,3192.96 2571.96,3060 2961.96,3060 3064.96,2957 6029,2957 6641,2345 6641,1963.96 6717.96,1887 6830.82,1887 6902.82,1815 6902.82,1723.07 v1(6895.32,1715.57)
MGTRX113_1_N: CN1F.12 J1.23 | length 8081.5
  Top Layer w11: J1.23@2898.23,4744.49 2948.78,4744.49 2952.88,4748.59 2997.5,4748.59 v1(3005,4741.09) v1@3005,4748.59 ; CN1F.12@7750.07,1571.85 7750.07,1618.43 7742.82,1625.68 7742.82,1708.07 v1(7750.32,1715.57)
  Bottom Layer w11: v1(3005,4741.09) 3003.11,4742.98 2938.02,4742.98 2875.04,4680 2758,4680 2645,4567 2645,3320 2715,3250 3077,3250 3176,3151 6820.04,3151 7481,2490.04 7481,1971 7548,1904 7660.86,1904 7742.82,1822.04 7742.82,1723.07 v1(7750.32,1715.57)
MGTRX113_1_P: CN1F.13 J1.21 | length 8106.8
  Top Layer w11: J1.21@2898.23,4769.68 2948.78,4769.68 2952.88,4765.59 2997.5,4765.59 v1(3005,4773.09) ; v1(7718.32,1715.57) 7725.82,1708.07 7725.82,1625.68 7718.57,1618.43 CN1F.13@7718.57,1571.85
  Bottom Layer w11: v1(3005,4773.09) 2997.5,4765.59 2936.59,4765.59 2868,4697 2750.96,4697 2628,4574.04 2628,3312.96 2707.96,3233 3069.96,3233 3168.96,3134 6813,3134 7464,2483 7464,1963.96 7540.96,1887 7653.82,1887 7725.82,1815 7725.82,1723.07 v1(7718.32,1715.57)
MGTTX112_0_N: C8A.1 J1.2 | length 5355.9
  Top Layer w11: v1(2379,5147.89) 2386.5,5140.39 2618.68,5140.39 2622.78,5144.49 J1.2@2672.64,5144.49 ; C8A.1@3195.18,1900.08 3218.18,1923.08 3218.18,1948.06 3218.18,1954 3218.18,1984 3218.18,1982.5 v1(3210.68,1990)
  Bottom Layer w11: v1(2379,5147.89) 2371.5,5140.39 2205.35,5140.39 1651,4586.04 1651,2384.96 1923.96,2112 3174,2112 3218.18,2067.82 v1@3218.18,1997.5 ; v1@3218.18,1997.5 v1(3210.68,1990) v1@3218.18,1997.5
MGTTX112_0_P: C7A.1 J1.4 | length 5329.1
  Top Layer w11: v1@2379,5123.39 v1(2379,5115.89) 2386.5,5123.39 2618.68,5123.39 2622.78,5119.29 J1.4@2672.64,5119.29 ; v1@3237.41,1995.27 v1(3242.68,1990) 3235.18,1982.5 3235.18,1923.08 C7A.1@3258.18,1900.08
  Bottom Layer w11: v1(2379,5115.89) 2371.5,5123.39 2212.39,5123.39 1668,4579 1668,2994 1668,2392 1931,2129 2562,2129 3181.04,2129 3235.18,2074.86 3235.18,1997.5 v1(3242.68,1990)
MGTTX112_1_N: C8B.1 J1.8 | length 5785.4
  Top Layer w11: v1(1859,4512) 1856.5,4512 1851,4517.5 1851,4645 2254.43,5048.43 2618.68,5048.43 2622.78,5044.33 J1.8@2672.64,5044.33 ; C8B.1@4018.18,1900.08 4041.18,1923.08 v1@4041.18,1982.5 ; v1(4033.68,1990) v1@4041.18,1982.5 ; v1@4041.18,1984 v1@4041.18,1982.5
  Bottom Layer w11: v1(1859,4512) 1850.35,4512 1828.5,4490.15 1828.5,4443.5 1831,4441 1831,2467.96 1971.96,2327 3839.18,2327 4041.18,2125 4041.18,1997.5 v1(4033.68,1990)
MGTTX112_1_P: C7B.1 J1.6 | length 5813.4
  Top Layer w11: 1834,4517.5 1834,4525 ; v1(1853,4480) 1834,4499 1834,4525 ; J1.6@2672.64,5069.53 2622.78,5069.53 2618.68,5065.43 2247.39,5065.43 1834,4652.04 1834,4525 ; v1@4060.41,1995.27 v1(4065.68,1990) 4058.18,1982.5 4058.18,1923.08 C7B.1@4081.18,1900.08
  Bottom Layer w11: v1(1853,4480) 1848,4475 1848,2475 1979,2344 3846.22,2344 4058.18,2132.04 4058.18,1997.5 v1(4065.68,1990)
MGTTX112_2_N: C8C.1 J1.12 | length 6160.2
  Top Layer w11: v1(2036,4413) 2036,4438 2036,4685 2324.47,4973.47 2618.68,4973.47 2622.78,4969.37 J1.12@2672.64,4969.37 ; C8C.1@4842.18,1901.08 4865.18,1924.08 v1@4865.18,1983.5 ; v1(4857.68,1991) v1@4865.18,1983.5 ; v1@4865.18,1985 v1@4865.18,1983.5
  Bottom Layer w11: v1(2036,4413) 2016.35,4413 1993.5,4390.15 1993.5,4348.54 1995,4347.04 1995,2635.96 2125.96,2505 4486.18,2505 4865.18,2126 4865.18,1998.5 v1(4857.68,1991)